# EAGLE board OMHIT (EAGLE 9.5.2)
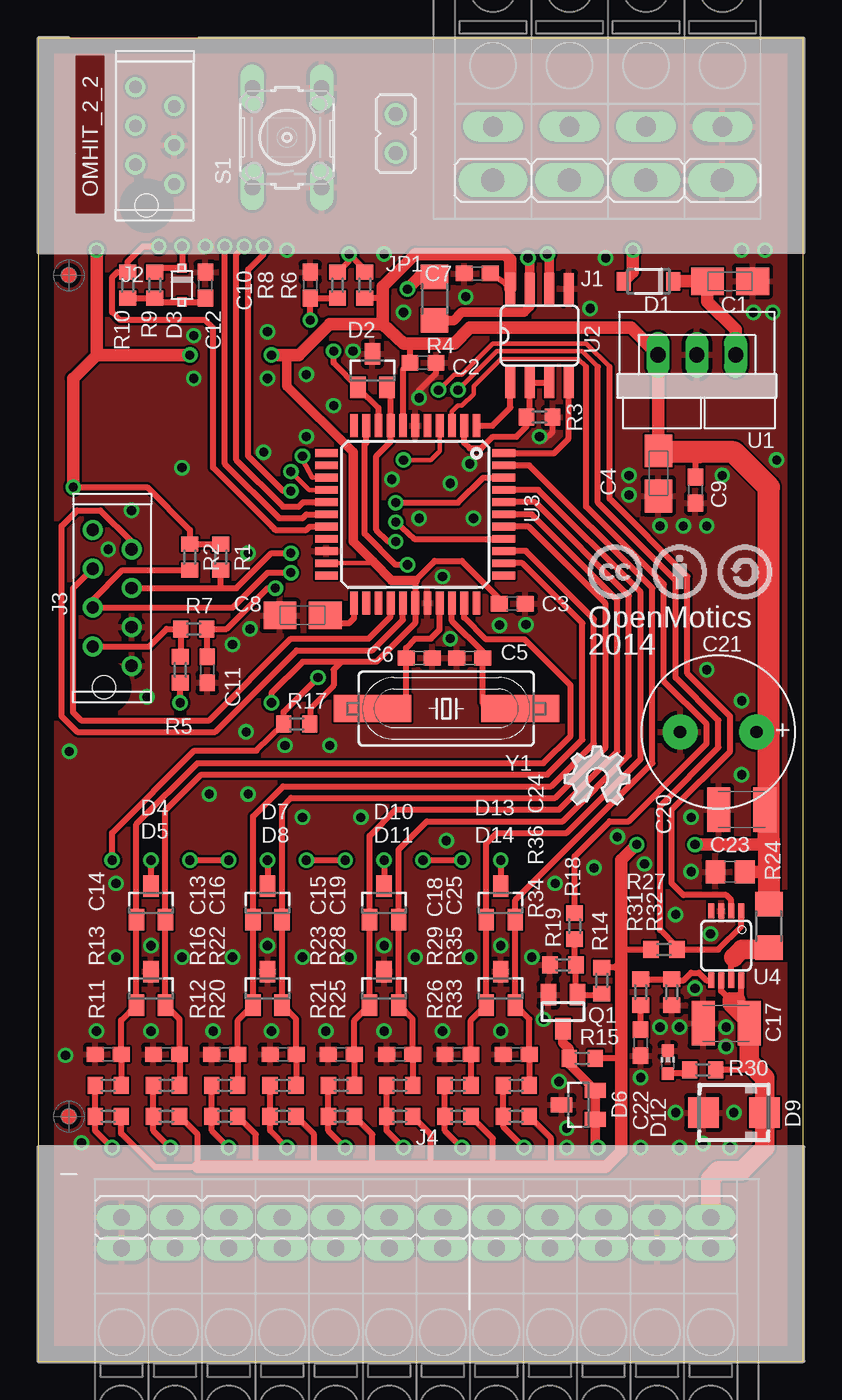
[diagram p0: board, top side]
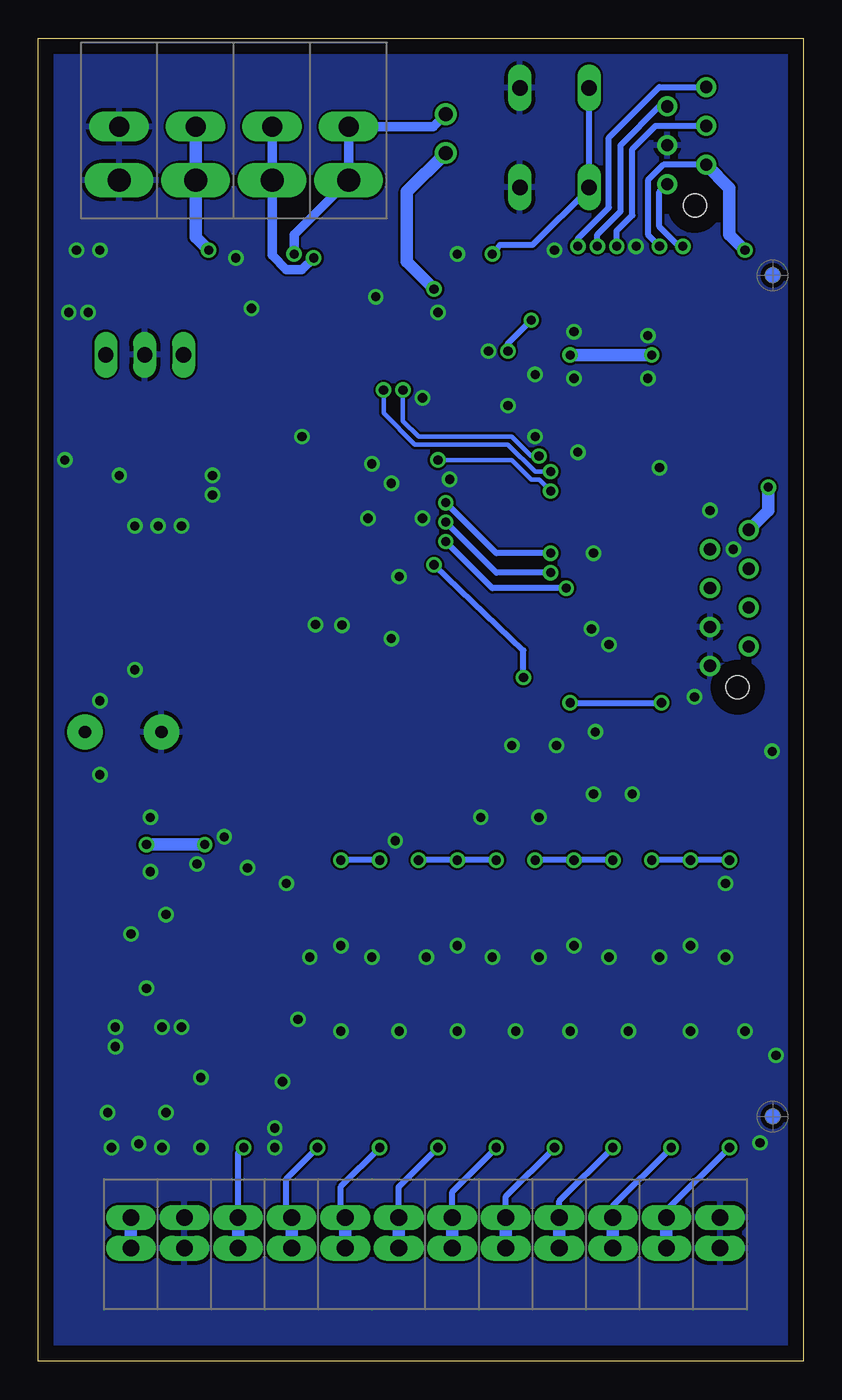
[diagram p1: board, bottom side, seen from below]

Size 50 x 86.5 mm. Coordinates in mm from the lower left corner, seen from the top.
Outline: 0,0 50,0 50,86.5 0,86.5 0,0
Copper layers (1+16): Top 0.035mm / dielectric 1.5mm / Bottom 0.035mm
Design rules "default *": minimum track width 10mil, minimum drill 24mil, track to track 6mil, track to pad 6mil, pad to pad 6mil, via to via 6mil, smd to smd 6mil, copper to edge 40mil, drill to drill 8mil, minimum pad ring 10mil, minimum via ring 8mil, stop-mask expansion 4mil, vias tented up to drill 0mil, thermal gap 10mil

## Footprints (pad centres in the part's own frame; a part is rotated, then mirrored left to right if it is on the bottom)
A3216-18W = smd 2.15 x 1.8: + 1.475,0; - -1.475,0
C0603 = smd 1.1 x 1: 1 -0.85,0; 2 0.85,0
C1210K = smd 1.5 x 2.9: 1 -1.5,0; 2 1.5,0
ELCO10MM = drill 0.8 pad 2.3: + -2.5,0; - 2.5,0
C0805 = smd 1.3 x 1.5: 1 -0.95,0; 2 0.95,0
SOD123FL = smd 0.91 x 1.22: A 1.625,0; C -1.625,0
SOT23 = smd 1 x 1.4: 1 -0.95,-1.1; 2 0.95,-1.1; 3 0,1.1
SOD323_REFLOW = smd 0.6 x 0.6: 1 1.1,0; 2 -1.1,0
SMA = smd 2 x 2: A 2,0; K -2,0
CHIP-LED0603 = smd 0.8 x 0.8: A 0,-0.75; C 0,0.75
PTDA_1.5_X-PH_5.0 = drill 1.5 long: P$1 0,0; P$2 5,0; P$3 10,0; P$4 15,0 | drill 1.3 long: P$5 0,3.5; P$6 5,3.5; P$7 10,3.5; P$8 15,3.5
PROG_CON_WITH_VERSION = drill 0.8: P$1 0,0; P$2 -2.54,1.27; P$3 0,2.54; P$4 -2.54,3.81; P$5 0,5.08; P$6 -2.54,6.35 | hole 1.5: -1.8,-1.4
8PIN_CON_AMP = drill 0.8: P$1 0,0; P$2 1.27,2.54; P$3 2.54,0; P$4 3.81,2.54; P$5 5.08,0; P$6 6.35,2.54; P$7 7.62,0; P$8 8.89,2.54 | hole 1.5: -1.4,1.8
PTDA_1.5_X-PH_3.5 = drill 1.1 pad 1.422 long: P$1 0,0; P$2 3.5,0; P$3 7,0; P$4 10.5,0; P$5 14,0; P$6 17.5,0; P$7 21,0; P$8 24.5,0; P$9 28,0; P$10 31.5,0; P$11 35,0; P$12 38.5,0; P$13 0,2; P$14 3.5,2; P$15 7,2; P$16 10.5,2; P$17 14,2; P$18 17.5,2; P$19 21,2; P$20 24.5,2; P$21 28,2; P$22 31.5,2; P$23 35,2; P$24 38.5,2
JP1S = drill 0.914: 1 1.27,1.27; 2 1.27,3.81
SUPER-SOT3 = smd 1 x 1.4: 1 -0.95,-1.1; 2 0.95,-1.1; 3 0,1.1
R0603 = smd 1 x 1.1: 1 -0.85,0; 2 0.85,0
R1206 = smd 1.6 x 1.803: 1 -1.422,0; 2 1.422,0
B3F-10XX = drill 1.016 long: 1 -3.251,2.261; 2 3.251,2.261; 3 -3.251,-2.261; 4 3.251,-2.261
OKI-78SR = drill 1 long: P$1 0,0; P$2 2.54,0; P$3 5.08,0
SO08 = smd 0.66 x 2.032: 1 -1.905,-3.073; 2 -0.635,-3.073; 3 0.635,-3.073; 4 1.905,-3.073; 5 1.905,3.073; 6 0.635,3.073; 7 -0.635,3.073; 8 -1.905,3.073
TQFP44 = smd 1.5 x 0.5: 1 -5.8,4; 2 -5.8,3.2; 3 -5.8,2.4; 4 -5.8,1.6; 5 -5.8,0.8; 6 -5.8,0; 7 -5.8,-0.8; 8 -5.8,-1.6; 9 -5.8,-2.4; 10 -5.8,-3.2; 11 -5.8,-4; 23 5.8,-4; 24 5.8,-3.2; 25 5.8,-2.4; 26 5.8,-1.6; 27 5.8,-0.8; 28 5.8,0; 29 5.8,0.8; 30 5.8,1.6; 31 5.8,2.4; 32 5.8,3.2; 33 5.8,4 | smd 0.5 x 1.5: 12 -4,-5.8; 13 -3.2,-5.8; 14 -2.4,-5.8; 15 -1.6,-5.8; 16 -0.8,-5.8; 17 0,-5.8; 18 0.8,-5.8; 19 1.6,-5.8; 20 2.4,-5.8; 21 3.2,-5.8; 22 4,-5.8; 34 4,5.8; 35 3.2,5.8; 36 2.4,5.8; 37 1.6,5.8; 38 0.8,5.8; 39 0,5.8; 40 -0.8,5.8; 41 -1.6,5.8; 42 -2.4,5.8; 43 -3.2,5.8; 44 -4,5.8
MSOP08 = smd 0.4 x 1: 1 -0.976,-2.263; 2 -0.326,-2.263; 3 0.324,-2.263; 4 0.974,-2.263; 5 0.974,2.262; 6 0.324,2.262; 7 -0.326,2.262; 8 -0.976,2.262
SM49 = smd 5.08 x 1.778: 1 -4.826,0; 2 4.826,0

## Placement (x,y rotation side)
C1  10uF 12V  [A3216-18W]  45.21,70.61 180 top
C2  100n  [C0603]  25.15,65.28 0 top
C3  100n  [C0603]  30.99,49.53 0 top
C4  10uF 5V  [A3216-18W]  40.54,58.05 90 top
C5  22p  [C0603]  28.19,45.97 0 top
C6  22p  [C0603]  24.89,45.97 180 top
C7  100n  [C0603]  28.7,71.12 180 top
C8  10u  [A3216-18W]  17.27,48.77 0 top
C9  100n  [C0603]  42.95,56.95 270 top
C10  1n  [C0603]  17.78,70.36 270 top
C11  1n  [C0603]  11.05,45.21 90 top
C12  100n  [C0603]  10.92,70.36 270 top
C13  1n  [C0603]  8.38,20.07 180 top
C14  1n  [C0603]  4.57,20.07 180 top
C15  1n  [C0603]  16,20.07 180 top
C16  1n  [C0603]  12.19,20.07 180 top
C17  22uF  [C1210K]  44.96,22.1 180 top
C18  1n  [C0603]  23.62,20.07 180 top
C19  1n  [C0603]  19.81,20.07 180 top
C20  22uF  [C1210K]  45.97,36.07 180 top
C21  1000uF  [ELCO10MM]  44.45,41.15 180 top
C22  100n  [C0603]  39.37,20.83 90 top
C23  1u  [C0805]  45.21,32 0 top
C24  1n  [C0603]  31.24,20.07 180 top
C25  1n  [C0603]  27.43,20.07 180 top
D1  S1ML  [SOD123FL]  39.88,70.61 180 top
D2  PESD5V2S2UT  [SOT23]  21.84,64.77 0 top
D3  BAT54J  [SOD323_REFLOW]  9.4,70.36 90 top
D4  BAT54A  [SOT23]  7.37,29.97 0 top
D5  PESD5V2S2UT  [SOT23]  7.37,24.38 0 top
D6  PESD3V3S2UAT  [SOT23]  35.31,16.76 90 top
D7  BAT54A  [SOT23]  14.99,29.97 0 top
D8  PESD5V2S2UT  [SOT23]  14.99,24.38 0 top
D9  SMAJ6.0A  [SMA]  45.47,16.26 180 top
D10  BAT54A  [SOT23]  22.61,29.97 0 top
D11  PESD5V2S2UT  [SOT23]  22.61,24.38 0 top
D12  LGQ971  [CHIP-LED0603]  41.15,19.56 0 top
D13  BAT54A  [SOT23]  30.23,29.97 0 top
D14  PESD5V2S2UT  [SOT23]  30.23,24.38 0 top
J1  PTDA_1.5_4-PH_5.0  [PTDA_1.5_X-PH_5.0]  29.72,77.22 0 top
J2  [PROG_CON_WITH_VERSION]  8.89,76.96 0 top
J3  8PIN_CON_AMP  [8PIN_CON_AMP]  6.1,45.47 90 top
J4  PTDA_1.5_12-PH_3.5  [PTDA_1.5_X-PH_3.5]  43.94,9.4 180 top
JP1  [JP1S]  22.1,77.72 0 top
LOGO2  OSHW_LOGO_FILLX0150-NT  [OSHW_FILLX150_NOTEXT]  34.4,36.4 0 top
Q1  PMBF170  [SUPER-SOT3]  34.29,22.86 180 top
R1  4K7  [R0603]  11.94,52.58 270 top
R2  4K7  [R0603]  9.91,52.58 270 top
R3  10K  [R0603]  32.77,61.72 180 top
R4  120E  [R1206]  25.91,69.47 90 top
R5  10K  [R0603]  9.27,45.21 270 top
R6  10K  [R0603]  21.34,70.36 270 top
R7  100E  [R0603]  10.16,47.88 180 top
R8  100E  [R0603]  19.56,70.36 90 top
R9  4K7  [R0603]  7.62,70.36 90 top
R10  470R  [R0603]  5.84,70.36 270 top
R11  10K  [R0603]  4.57,16 0 top
R12  10K  [R0603]  8.38,16 0 top
R13  100R  [R0603]  4.57,18.03 180 top
R14  10K  [R0603]  36.83,24.89 90 top
R15  10K  [R0603]  35.56,19.81 0 top
R16  100R  [R0603]  8.38,18.03 180 top
R17  10K  [R0603]  16.89,41.66 0 top
R18  470E  [R0603]  35.05,28.45 90 top
R19  10K  [R0603]  34.29,25.91 0 top
R20  10K  [R0603]  12.19,16 0 top
R21  10K  [R0603]  16,16 0 top
R22  100R  [R0603]  12.19,18.03 180 top
R23  100R  [R0603]  16,18.03 180 top
R24  0R  [R1206]  47.75,28.45 270 top
R25  10K  [R0603]  19.81,16 0 top
R26  10K  [R0603]  23.62,16 0 top
R27  100K  [R0603]  40.89,26.92 180 top
R28  100R  [R0603]  19.81,18.03 180 top
R29  100R  [R0603]  23.62,18.03 180 top
R30  560R  [R0603]  43.43,19.05 0 top
R31  232R  [R0603]  39.37,24.13 90 top
R32  470R  [R0603]  41.4,24.13 90 top
R33  10K  [R0603]  27.43,16 0 top
R34  10K  [R0603]  31.24,16 0 top
R35  100R  [R0603]  27.43,18.03 180 top
R36  100R  [R0603]  31.24,18.03 180 top
S1  [B3F-10XX]  16.26,80.01 90 top
U1  OKI-78SR  [OKI-78SR]  45.58,65.81 180 top
U2  MAX481CSA  [SO08]  32.77,67.06 0 top
U3  PIC18F4XK80  [TQFP44]  24.64,55.37 270 top
U4  MIC2548-1YMM  [MSOP08]  44.96,27.18 180 top
U$1  [FIDUCIAL_G10]  2,16 0 top
U$2  [FIDUCIAL_G10]  2,71 0 top
U$3  [FIDUCIAL_G10]  2,16 0 bottom
U$4  CNMB/3  [CNMB/3-]  -1.5,-1.75 0 top
U$5  CC_BY_SA  [CC_BY_SA]  41.9,51.6 0 top
U$12  [FIDUCIAL_G10]  2,71 0 bottom
Y1  10MHz  [SM49]  26.67,42.67 180 top

## Library data of the parts
C1-C16 C18 C19 C22 C24 C25 R1-R10 R27 R30-R32 = resistor
C17 C20 C23 R11-R26 R28 R29 R33-R36 = rcl
C21 = Condensator
D1 D4 D7 D10 D13 = diode
D2 D3 D5 D6 D8 D9 D11 D14 J1 J3 J4 U1 U3 U4 U$4 = OpenMotics
D12 = led
J2 = OpenMotics; VERSION: OMHIT_2_2
JP1 = jumper
LOGO2 = ohw-logo
Q1 = transistor-power
S1 = switch-omron; MPN: B3F-1000; OC_FARNELL: 176432; OC_NEWARK: 36M3542
U2 = maxim
U$1-U$3 U$12 = dicons
U$5 = OpenMotics; COMPANYNAME: OpenMotics; YEAR: 2014
Y1 = crystal

## Nets
0V: C1.- C2.2 C3.2 C4.- C5.1 C6.1 C7.2 C8.- C9.2 C10.1 C11.1 C12.1 C13.2 C14.2 C15.2 C16.2 C17.2 C18.2 C19.2 C20.2 C21.- C22.1 C23.1 C24.2 C25.2 D2.3 D5.3 D6.3 D8.3 D9.A D11.3 D12.C D14.3 J1.P$4 J1.P$8 J2.P$3 J3.P$1 J3.P$3 J4.P$2 J4.P$12 J4.P$14 J4.P$24 Q1.2 R3.1 R19.1 R32.1 S1.3 S1.4 U1.P$2 U2.5 U3.6 U3.20 U3.29 U4.3
5V_OUT: C17.1 D9.K J4.P$1 J4.P$13 R30.2 U4.6 U4.8
12V: C1.+ D1.C U1.P$1
12V_IN: D1.A J1.P$3 J1.P$7
+5V: C2.1 C3.1 C4.+ C7.1 C9.1 C20.1 C21.+ C23.2 D3.1 J2.P$2 J3.P$8 R1.1 R2.1 R5.2 R6.2 R9.2 R11.2 R12.2 R14.2 R15.2 R17.2 R20.2 R21.2 R24.1 R25.2 R26.2 R27.2 R33.2 R34.2 U1.P$3 U2.8 U3.7 U3.21 U3.28
BUT: C11.2 D2.2 R7.1 U3.8
BUT1: R6.1 R8.2 S1.1 S1.2
BUT2: C10.2 D2.1 R8.1 U3.9
BUT_TOP: J3.P$2 R5.1 R7.2
CHECK_SC: U3.14 U4.2
CLK: D6.1 D6.2 J4.P$3 J4.P$15 Q1.3 R15.1
CLOCK: R18.2 U3.3
DBG: J2.P$6 U3.4
IN1: J4.P$11 J4.P$23 R11.1 R13.2
IN2: J4.P$10 J4.P$22 R12.1 R16.2
IN3: J4.P$9 J4.P$21 R20.1 R22.2
IN4: J4.P$8 J4.P$20 R21.1 R23.2
IN5: J4.P$7 J4.P$19 R25.1 R28.2
IN6: J4.P$6 J4.P$18 R26.1 R29.2
IN7: J4.P$5 J4.P$17 R33.1 R35.2
IN8: J4.P$4 J4.P$16 R34.1 R36.2
INPUT1: C14.1 D4.1 D5.1 R13.1 U3.32
INPUT2: C13.1 D4.2 D5.2 R16.1 U3.35
INPUT3: C16.1 D7.1 D8.1 R22.1 U3.36
INPUT4: C15.1 D7.2 D8.2 R23.1 U3.38
INPUT5: C19.1 D10.1 D11.1 R28.1 U3.39
INPUT6: C18.1 D10.2 D11.2 R29.1 U3.40
INPUT7: C25.1 D13.1 D14.1 R35.1 U3.41
INPUT8: C24.1 D13.2 D14.2 R36.1 U3.43
INTR_BUTTONS: D4.3 D7.3 D10.3 D13.3 R17.1 U3.10
MCLR#1: J2.P$1 R10.1 U3.18
N$1: JP1.1 R4.2
N$9: C12.2 D3.2 R9.1 R10.2
N$16: Q1.1 R14.1 R18.1 R19.2
N$30: C5.2 U3.31 Y1.1
N$32: C6.2 U3.30 Y1.2
N$33: C8.+ U3.23
N$81: D12.A R30.1
N$480: R24.2 U4.7
N$481: R31.2 R32.2 U4.5
N$482: C22.2 R31.1
PGC#1: J2.P$5 U3.16
PGD#1: J2.P$4 U3.17
POWER_ON: R27.1 U3.15 U4.1
RS485_A: J1.P$1 J1.P$5 JP1.2 U2.6
RS485_B: J1.P$2 J1.P$6 R4.1 U2.7
RS485_DIR: R3.2 U2.2 U2.3 U3.2
RS485_RX: U2.1 U3.1
RS485_TX: U2.4 U3.44
SCL: J3.P$4 R2.2 U3.37
SDA: J3.P$5 R1.2 U3.42
STAT1: J3.P$7 U3.27
STAT2: J3.P$6 U3.26

## Tracks (layer width: path | path; a pad name or v marks a point on that pad's centre or on a via)
0V  (via drill 0.6)
  Top 0.406: R3.1 33.62,60.79 33.02,60.2 | v24.89,62.99 24.89,63.5 26,64.6 C2.2
  other vias: 16.26,72.64 23.88,68.58 27.94,69.6 7.37,27.18 14.99,27.18 22.61,27.18 30.23,27.18 15.24,21.59 11.43,21.59 18.8,21.59 22.61,21.59 26.42,21.59 30.23,21.59 7.37,21.59 3.81,21.59 32.26,26.42 24.64,26.42 31.87,48.16 28.19,58.67 26.42,51.31 26.92,47.24 19.05,40.26 13.84,47.88 11.18,37.08 13.72,37.08 16.13,40.26 5.08,31.24 17.27,35.56 21.08,35.56 26.67,34.04 36.32,32.26 30.14,48.13 26.92,57.4 24.89,55.12 28.45,55.12 20.57,66.04 14.99,64.26 14.73,59.44 9.4,58.42 6.1,55.63 13.72,52.83 2.03,39.88 2.83,14.28 1.78,20 34.54,13.97 28.19,26.42 20.32,26.42 17.27,26.42 12.7,26.42 9.4,26.42 5.08,26.42 10.16,64.26 17.53,60.45 4.57,53.09 7.11,43.43 37.85,34.29 32.77,60.45 17.53,64.52 19.3,62.48 22.61,72.39 37.08,72.14 34.04,18.29 39.37,18.54 41.91,21.84 40.64,21.84 44.96,21.84 45.47,16.26 41.66,16.26 43.43,14.22 39.37,13.97 41.91,13.97 45.21,13.97 42.93,24.38 44.96,20.57 43.94,27.94 42.67,32 42.67,35.56 45.97,38.35 45.97,43.18 43.69,45.21 39.62,32.51 41.66,29.21 33.02,22.35 33.78,31.24 34.54,15.24 12.7,46.86 13.59,41.15 23.11,57.66 38.61,57.91 38.61,56.64 40.64,54.61 42.16,54.61 43.69,54.61 44.7,57.91 48.26,58.93 48.01,68.58 46.74,68.58 45.97,72.64 47.5,72.64 14.99,67.31 10.16,67.06 10.92,72.9 36.07,68.83
  pour Bottom: 0.25,86.36 49.78,86.36 49.78,0.25 0.25,0.25
  pour Top: 14.22,86.36 49.78,86.36 49.78,0.25 0.25,0.25 0.25,86.42 14.22,86.42
5V_OUT
  Top 0.406: R30.2 46.48,19.05 46.74,19.3 46.46,19.58 | U4.6 44.63,24.2 45.21,23.62 | U4.8 45.93,22.82 45.85,22.73
  Top 1.016: C17.1 46.46,22.12 45.85,22.73 45.72,22.86 | 45.72,22.86 45.21,23.37 45.21,23.62 45.72,23.62 45.72,22.86
  Top 1.27: C17.1 46.46,19.58 47.5,18.54 47.5,16.29 D9.K 47.5,16.22 47.5,13.97 45.97,12.45 44.45,12.45 43.94,11.94 J4.P$1
  Bottom 0.813: J4.P$13 J4.P$1
12V
  Top 0.813: D1.C C1.+ 43.74,69.29 45.58,67.45 U1.P$1
12V_IN  (via drill 0.6)
  Top 0.813: v38.86,72.64 38.86,71.22 D1.A
  Bottom 0.813: J1.P$7 J1.P$3 39.72,73.5 v38.86,72.64
+5V  (via drill 0.6)
  Top 0.305: U3.21 21.88,52.17 21.88,52.28
  Top 0.406: C7.1 30.54,70.45 U2.8 | R6.2 22.18,69.51 22.52,69.85 | R11.2 5.42,14.9 7.62,12.7 10.41,12.7 10.41,14.82 R12.2 | R20.2 14.22,14.82 14.22,12.7 | R21.2 18.03,14.82 18.03,12.7 | R25.2 21.84,14.82 21.84,12.7 | R26.2 25.65,14.82 25.65,12.7 | R33.2 29.72,14.57 29.72,12.7 | R34.2 33.53,14.57 33.53,12.7 | C3.1 30.14,49.87 27.69,52.32 25.91,52.32 24.64,51.05 U3.28 24.64,48.26 22.1,45.72 19.81,45.72 | 19.81,45.72 19.3,45.21 19.3,44.2 17.78,42.67 17.78,41.66 R17.2 | U3.7 23.84,64.82 C2.1 24.3,66.38 23.88,66.55 | 38.1,20.07 37.85,19.81 R15.2 | R14.2 37.68,25.74 38.1,26.16 | R27.2 38.1,26.92 38.1,27.43 | C20.1 47.75,36.07 47.75,34.04 | v9.27,43.05 R5.2 | v15.24,43.05 15.24,43.69 17.27,45.72 19.81,45.72 | C9.1 42.95,59.21 43.18,59.44 | R1.1 R2.1 9.91,54.36 7.11,57.15 v2.29,57.15 | v9.4,72.9 D3.1 7.87,71.46 R9.2
  Top 0.61: 24.64,51.05 23.11,51.05 21.88,52.28 20.57,53.59 20.57,59.44 16.26,63.75 16.26,65.79
  Top 0.813: U2.8 30.86,72.01 30.48,72.39 24.64,72.39 22.52,70.27 22.52,69.85 22.52,67.82 | 10.41,12.7 14.22,12.7 18.03,12.7 21.84,12.7 25.65,12.7 29.72,12.7 33.53,12.7 37.08,12.7 38.1,13.72 38.1,20.07 38.1,26.16 38.1,27.43 38.1,32.77 v39.12,33.78 | 22.52,67.82 19.05,67.82 17.02,65.79 16.26,65.79 v15.24,65.79 | 22.52,67.82 23.88,66.55 27.18,66.55 28.19,67.56 38.75,67.56 U1.P$3 40.54,65.78 C4.+ | v42.93,33.78 47.75,33.78 | C23.2 47.75,32 47.75,32.26 | C21.+ 47.75,40.85 47.75,41.15 | v2.29,57.15 2.29,64.26 3.81,65.79 | v9.91,65.79 3.81,65.79 | 3.81,65.79 v3.81,72.64
  Top 1.27: 40.62,59.44 C4.+
  Top 1.422: R24.1 47.75,32.26 47.75,33.78 47.75,34.04 47.75,41.15 47.75,57.15 45.47,59.44 43.18,59.44 40.62,59.44
  Bottom 0.406: v15.24,43.05 v9.27,43.05 | v9.4,72.9 10.16,73.66 10.16,77.22 9.14,78.23 J2.P$2
  Bottom 0.813: v39.12,33.78 v42.93,33.78 | v15.24,65.79 v9.91,65.79 | v2.29,57.15 2.29,55.63 J3.P$8 | J2.P$2 4.83,76.71 4.83,73.66 v3.81,72.64
BUT  (via drill 0.6)
  Top 0.406: v23.37,53.59 22.86,53.59 22.1,54.36 22.1,59.18 23.04,60.12 U3.8 | U3.8 23.11,61.1 | v15.49,50.55 14.99,50.55 12.32,47.88 R7.1 11.05,47.84 C11.2 | U3.8 23.04,63.43 D2.2
  Bottom 0.406: v15.49,50.55 20.32,50.55 v23.37,53.59
BUT1  (via drill 0.6)
  Top 0.406: R6.1 21.34,71.37 v20.32,72.39 20.32,71.97 R8.2
  Bottom 0.406: S1.2 S1.1 13.97,76.71 17.7,72.97 19.81,72.97 v20.32,72.39
BUT2  (via drill 0.6)
  Top 0.406: R8.1 C10.2 17.78,68.33 arc90 v17.78,68.07 | U3.9 22.24,62.33 D2.1 19.3,65.26 v19.3,66.04
  Bottom 0.406: v19.3,66.04 19.3,66.55 19.05,66.8 v17.78,68.07
BUT_TOP
  Top 0.406: R5.1 9.31,46.1 R7.2 8.38,47.88 7.24,46.74 J3.P$2
CHECK_SC  (via drill 0.6)
  Top 0.305: 37.34,65.02 35.81,66.55 29.72,66.55 27.69,64.52 27.18,64.52 v26.16,63.5 | U3.14 17.92,57.77 17.27,58.93 v17.27,59.18
  Top 0.406: 37.34,65.02 37.34,56.39 42.42,51.31 42.42,44.96 45.21,42.16 45.21,39.88 41.4,36.07 41.4,31.24 42.16,30.48 44.96,30.48 45.28,30.15 U4.2
  Bottom 0.305: v17.27,59.18 17.78,59.18 19.05,60.45 25.15,60.45 26.16,61.47 v26.16,63.5
CLK  (via drill 0.6)
  Top 0.61: v36.58,13.97 36.41,14.14 D6.1 D6.2 34.71,19.41 R15.1 34.71,20.41 34.29,20.83 Q1.3
  Bottom 0.406: J4.P$3 36.94,13.6 v36.58,13.97
  Bottom 0.813: J4.P$15 J4.P$3
CLOCK
  Top 0.305: U3.3 27.04,62.09 27.43,62.48 27.69,62.48 28.45,63.25 28.45,63.75 30.23,65.53 35.31,65.53 35.81,65.02
  Top 0.406: 35.81,65.02 35.81,55.88 40.89,50.8 40.89,44.45 43.69,41.66 43.69,40.39 38.61,35.31 37.34,35.31 35.05,33.02 R18.2
DBG  (via drill 0.6)
  Top 0.305: U3.4 26.24,59.51 25.65,58.93 v23.88,58.93
  Top 0.406: v16.51,56.9 16,56.9 13.72,59.18 13.72,71.37 14.73,72.39 v14.73,72.9
  Bottom 0.305: v23.88,58.93 19.05,58.93 17.78,57.66 17.27,57.66 v16.51,56.9
  Bottom 0.406: J2.P$6 9.4,83.31 12.7,80.01 12.7,75.44 14.48,73.66 14.73,73.41 v14.73,72.9
IN1  (via drill 0.6)
  Top 0.406: R13.2 R11.1 3.72,15.07 v4.83,13.97
  Bottom 0.406: v4.83,13.97 8.94,9.85 J4.P$11
  Bottom 0.813: J4.P$23 J4.P$11
IN2  (via drill 0.6)
  Top 0.406: R16.2 R12.1 7.53,15.07 v8.64,13.97
  Bottom 0.406: v8.64,13.97 12.44,10.16 J4.P$10
  Bottom 0.813: J4.P$22 J4.P$10
IN3  (via drill 0.6)
  Top 0.406: R22.2 R20.1 11.34,15.07 v12.45,13.97
  Bottom 0.406: v12.45,13.97 15.94,10.47 J4.P$9
  Bottom 0.813: J4.P$21 J4.P$9
IN4  (via drill 0.6)
  Top 0.406: R23.2 R21.1 15.15,15.07 v16.26,13.97
  Bottom 0.406: J4.P$8 19.44,10.78 v16.26,13.97
  Bottom 0.813: J4.P$20 J4.P$8
IN5  (via drill 0.6)
  Top 0.406: R28.2 R25.1 18.96,15.07 v20.07,13.97
  Bottom 0.406: J4.P$7 22.94,11.09 v20.07,13.97
  Bottom 0.813: J4.P$19 J4.P$7
IN6  (via drill 0.6)
  Top 0.406: R29.2 R26.1 22.77,15.07 v23.88,13.97
  Bottom 0.406: J4.P$6 26.44,11.4 v23.88,13.97
  Bottom 0.813: J4.P$18 J4.P$6
IN7  (via drill 0.6)
  Top 0.406: R35.2 R33.1 26.58,15.07 v27.69,13.97
  Bottom 0.406: J4.P$5 30.23,9.4 30.23,11.43 v27.69,13.97
  Bottom 0.813: J4.P$17 J4.P$5
IN8  (via drill 0.6)
  Top 0.406: R36.2 R34.1 30.39,15.33 v31.75,13.97
  Bottom 0.406: J4.P$4 33.78,9.4 33.78,11.94 v31.75,13.97
  Bottom 0.813: J4.P$16 J4.P$4
INPUT1
  Top 0.406: R13.1 C14.1 5.42,22.29 D5.1 D4.1 6.42,35.12 10.41,39.12 33.02,39.12 34.8,40.89 34.8,44.2 31.8,47.2 29.26,47.2 27.84,48.62 U3.32
INPUT2
  Top 0.406: R16.1 C13.1 9.23,22.37 D5.2 D4.2 8.32,36 10.67,38.35 33.27,38.35 35.56,40.64 35.56,48.26 31.65,52.17 U3.35
INPUT3
  Top 0.406: R22.1 C16.1 13.04,22.29 D8.1 D7.1 14.04,35.63 16,37.59 33.53,37.59 36.32,40.39 36.32,48.51 31.86,52.97 U3.36
INPUT4
  Top 0.406: R23.1 C15.1 16.85,22.37 D8.2 D7.2 15.94,36.26 16.51,36.83 33.78,36.83 37.08,40.13 37.08,49.53 32.04,54.57 U3.38
INPUT5
  Top 0.406: R28.1 C19.1 20.66,22.29 D11.1 D10.1 21.66,34.36 23.37,36.07 34.04,36.07 37.85,39.88 37.85,49.78 32.26,55.37 U3.39
INPUT6
  Top 0.406: R29.1 C18.1 24.47,22.37 D11.2 D10.2 23.56,33.46 25.4,35.31 34.29,35.31 38.61,39.62 38.61,50.04 32.47,56.17 U3.40
INPUT7
  Top 0.406: R35.1 C25.1 28.28,22.29 D14.1 D13.1 29.28,33.85 29.97,34.54 34.54,34.54 39.37,39.37 39.37,50.29 32.69,56.97 U3.41
INPUT8
  Top 0.406: R36.1 C24.1 32.09,22.37 D14.2 D13.2 31.18,30.16 40.13,39.12 40.13,50.55 32.11,58.57 U3.43
INTR_BUTTONS  (via drill 0.6)
  Top 0.406: v30.23,32.77 D13.3 | v25.15,32.77 v27.69,32.77 | v17.53,32.77 v20.07,32.77 | v9.91,32.77 v12.45,32.77 | v7.37,32.77 D4.3 | v14.99,32.77 D7.3 | v22.61,32.77 D10.3 | v4.83,32.77 4.83,34.54 10.2,39.92 14.26,39.92 R17.1 16.04,42.46 v18.29,44.7 | U3.10 21.44,60.05 21.34,59.94 21.34,54.1 23.37,52.07 v24.13,52.07
  Bottom 0.406: v27.69,32.77 v30.23,32.77 | v20.07,32.77 v22.61,32.77 v25.15,32.77 | v12.45,32.77 v14.99,32.77 v17.53,32.77 | v4.83,32.77 v7.37,32.77 v9.91,32.77 | v18.29,44.7 18.29,46.48 v24.13,52.07
MCLR#1  (via drill 0.6)
  Top 0.406: U3.18 17.74,54.57 17.53,54.36 15.49,54.36 15.28,54.57 11.43,58.42 11.43,67.56 10.92,68.07 5.33,68.07 4.83,68.58 4.83,70.87 5.17,71.21 R10.1 5.84,71.88 6.86,72.9 v7.87,72.9
  Bottom 0.406: v7.87,72.9 8.13,72.9 9.4,74.17 9.4,76.45 J2.P$1
N$1  (via drill 0.6)
  Top 0.813: R4.2 24.92,70.89 v24.13,70.1
  Bottom 0.813: v24.13,70.1 25.91,71.88 25.91,76.45 JP1.1
N$9
  Top 0.406: R10.2 R9.1 7.87,69.26 D3.2 10.67,69.26 C12.2
N$16
  Top 0.406: R14.1 36.75,23.96 Q1.1 35.14,24.06 R19.2 35.05,26 R18.1
N$30
  Top 0.406: U3.31 27.04,48.4 29.04,46.39 C5.2 29.04,43.09 29.21,42.67 Y1.1
N$32
  Top 0.406: Y1.2 24.04,42.84 C6.2 24.04,46.65 24.64,47.24 25.65,47.24 26.24,47.83 U3.30
N$33
  Top 0.406: C8.+ 19.25,48.26 20.32,48.26 20.64,48.58 U3.23
N$81
  Top 0.406: R30.1 42.09,18.81 D12.A
N$480
  Top 0.406: U4.7 45.28,26.09 45.47,26.42
  Top 1.27: R24.2 47.5,26.92 45.97,26.92 45.47,26.42
N$481
  Top 0.406: R31.2 R32.2 41.47,24.92 42.19,24.92 42.67,25.4 43.18,25.4 43.66,24.92 U4.5
N$482
  Top 0.406: C22.2 R31.1
PGC#1  (via drill 0.6)
  Top 0.406: U3.16 17.31,56.17 17.02,55.88 16,55.88 12.95,58.93 12.95,72.39 v13.46,72.9
  Bottom 0.406: J2.P$5 9.4,82.04 11.94,79.5 11.94,75.18 13.46,73.66 v13.46,72.9
PGD#1  (via drill 0.6)
  Top 0.406: U3.17 17.53,55.37 17.27,55.12 15.75,55.12 12.19,58.67 v12.19,72.9
  Bottom 0.406: J2.P$4 9.65,80.77 11.18,79.25 11.18,74.93 12.19,73.91 v12.19,72.9
POWER_ON  (via drill 0.6)
  Top 0.305: 36.58,65.02 35.56,66.04 29.97,66.04 v27.43,63.5 | U3.15 17.7,56.97 v16.51,58.17
  Top 0.406: 36.58,65.02 36.58,56.13 41.66,51.05 41.66,44.7 44.45,41.91 44.45,40.13 40.64,36.32 40.64,28.19 41.74,27.09 R27.1 44.45,26.92 45.93,28.41 U4.1
  Bottom 0.305: v16.51,58.17 17.53,58.17 19.3,59.94 25.4,59.94 27.43,61.98 v27.43,63.5
RS485_A  (via drill 0.6)
  Top 0.61: U2.6 33.4,72.26 v33.27,72.39
  Bottom 0.61: v33.27,72.39 33.27,73.66 J1.P$1 J1.P$5 24.19,80.72 JP1.2
RS485_B  (via drill 0.6)
  Top 0.61: v32,72.14 32.13,71.75 U2.7 32.13,68.96 31.75,68.58 27.69,68.58 27.15,68.05 R4.1
  Bottom 0.61: J1.P$6 J1.P$2 34.72,72.31 33.78,71.37 32.77,71.37 v32,72.14
RS485_DIR
  Top 0.406: U3.2 27.84,60.05 28.19,59.69 28.96,59.69 29.72,60.45 31.24,60.45 31.92,61.13 R3.2 arc90 32.13,61.94 U2.2 U2.3
RS485_RX
  Top 0.406: U3.1 29.68,61.17 30.86,62.36 U2.1
RS485_TX
  Top 0.406: U3.44 33.72,59.37 34.67,60.33 U2.4
SCL  (via drill 0.6)
  Top 0.406: U3.37 24.56,53.77 v23.37,54.86 | v16.51,51.56 14.99,51.56 12.7,49.28 J3.P$4 3.56,49.78 5.5,51.73 R2.2
  Bottom 0.406: v23.37,54.86 20.07,51.56 v16.51,51.56
SDA  (via drill 0.6)
  Top 0.406: v23.37,56.13 27.43,56.13 29.07,57.77 U3.42 | v16.51,52.83 15.24,52.83 12.95,50.55 11.94,50.55 | J3.P$5 11.94,50.55 | 11.94,50.55 R1.2
  Bottom 0.406: v16.51,52.83 20.07,52.83 v23.37,56.13
STAT1
  Top 0.406: U3.27 23.84,48.48 21.84,46.48 16.89,46.48 11.56,41.15 2.54,41.15 1.52,42.16 1.52,54.61 2.54,55.63 4.06,55.63 6.1,53.59 J3.P$7
STAT2
  Top 0.406: U3.26 23.04,48.69 21.59,47.24 16.51,47.24 11.18,41.91 2.79,41.91 2.29,42.42 2.29,50.55 J3.P$6